# EAGLE board chuck_rev_1 (EAGLE 6.3)
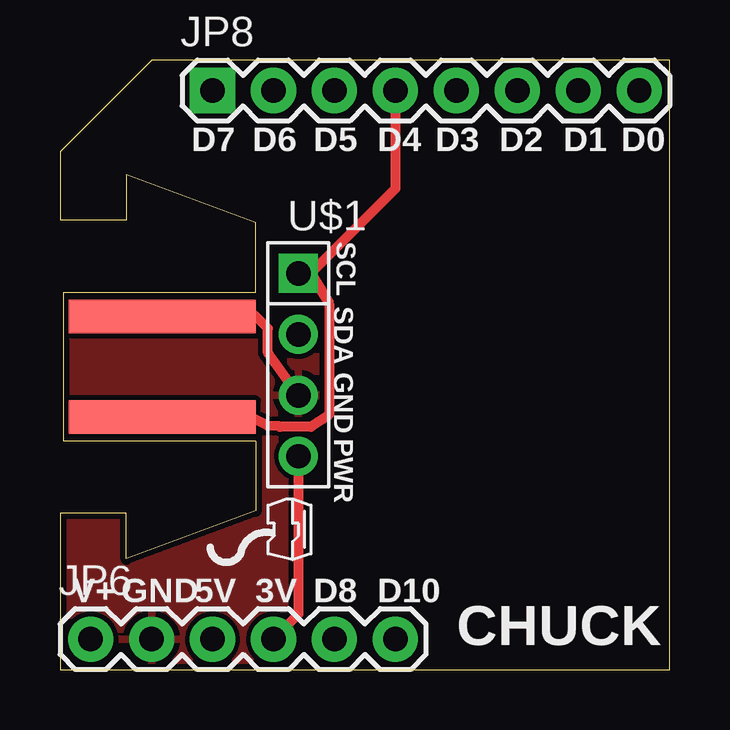
[diagram p0: board, top side]
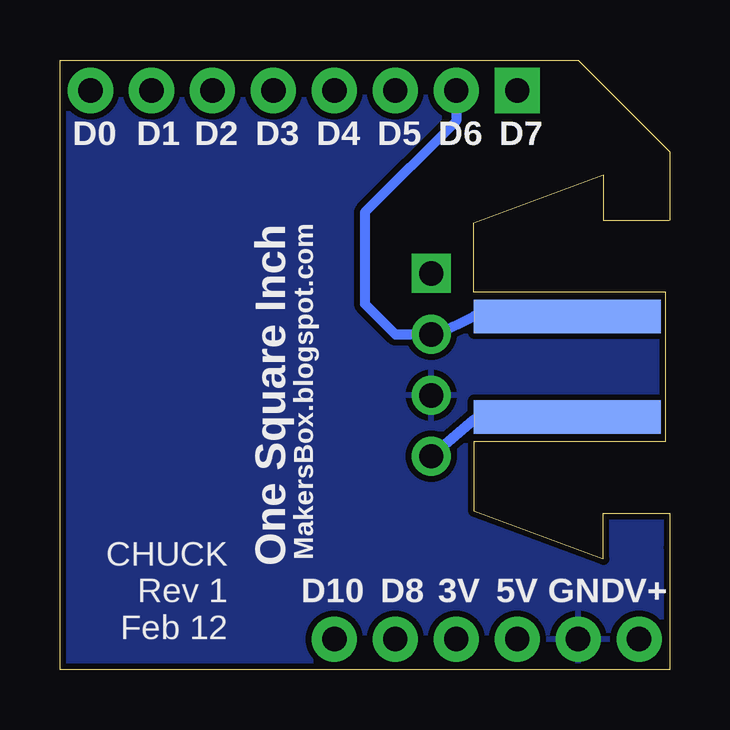
[diagram p1: board, bottom side, seen from below]

Size 25.41 x 25.4 mm. Coordinates in mm from the lower left corner, seen from the top.
Outline: 25.41,25.4 25.41,21.59 25.41,0 24.77,0 24.77,0 0.01,0 0.01,6.35
Outline: 25.41,25.4 3.82,25.4 0.01,21.59
Outline: 0.01,21.59 0.01,21.59
Outline: 0.01,21.59 0.01,19.05
Copper layers (1*16): Top 0.035mm / dielectric 1.5mm / Bottom 0.035mm
Design rules "SparkFun": minimum track width 8mil, minimum drill 20mil, track to track 8mil, track to pad 8mil, pad to pad 8mil, via to via 8mil, smd to smd 8mil, copper to edge 10mil, drill to drill 8mil, minimum pad ring 12mil, minimum via ring 10mil, stop-mask expansion 4mil, vias tented up to drill 25mil, thermal gap 10mil

## Footprints (pad centres in the part's own frame; a part is rotated, then mirrored left to right if it is on the bottom)
1X06 = drill 1.016 pad 1.88: 1 0,0; 2 2.54,0; 3 5.08,0; 4 7.62,0; 5 10.16,0; 6 12.7,0
1X08 = drill 1.016 pad 1.88 square: 1 0,0 | drill 1.016 pad 1.88: 2 2.54,0; 3 5.08,0; 4 7.62,0; 5 10.16,0; 6 12.7,0; 7 15.24,0; 8 17.78,0
CONN = drill 1.016: GND -0.23,3.81; SDA -0.23,6.35; VCC -0.23,1.27 | smd 7.8 x 1.4 bottom: P$1_SDA -5.9,7.1; P$4_VCC -5.9,2.9 | smd 7.8 x 1.4: P$2_SCL -5.9,2.9; P$3_GND -5.9,7.1 | drill 1.016 square: SCL -0.23,8.89

## Placement (x,y rotation side)
JP6  [1X06]  1.28,1.27 0 top
JP8  [1X08]  6.36,24.13 0 top
U$1  NUNCHUCKCHUCK  [CONN]  10.17,7.62 0 top

## Library data of the parts
JP6 JP8 = SparkFun
U$1 = _my-parts

## Nets
+3V3: JP6.4 U$1.VCC
+5V: JP6.3
AREF_D0: JP8.8
D1: JP8.7
D2: JP8.6
D3: JP8.5
D5: JP8.3
D7: JP8.1
D8: JP6.5
D10: JP6.6
GND: JP6.2 U$1.GND
SCL_D4: JP8.4 U$1.SCL
SDA_D6: JP8.2 U$1.SDA
V+: JP6.1

## Tracks (layer width: path | path; a pad name or v marks a point on that pad's centre or on a via)
+3V3
  Top 0.406: U$1.VCC 9.94,2.31 JP6.4
GND
  pour Bottom (isolate 0.254): -1.26,26.67 26.68,26.67 26.68,-1.27 -1.26,-1.27
  pour Top: -0.63,26.04 26.68,26.04 26.68,0 26.04,-0.64 -0.63,-0.64
SCL_D4
  Top 0.406: JP8.4 13.98,20.04 10.44,16.51
SDA_D6
  Bottom 0.406: JP8.2 8.9,22.86 12.71,19.05 12.71,15.24 11.44,13.97 U$1.SDA

## Text on the board
tPlace: D7 | D6 | D5 | D4 | D3 | D2 | D1 | D0 | V+ | GND | 5V | 3V | D8 | D10 | CHUCK
bPlace: D7 | D6 | D5 | D4 | D3 | D2 | D1 | D0 | MakersBox.blogspot.com | CHUCK / Rev 1 / Feb 12 | One Square Inch | V+ | GND | 5V | 3V | D8 | D10